# Altium PCB Cam_HDMI.PcbDoc
Units mm, origin at the board's own origin, x right, y up, seen from the top; angles counter-clockwise.
Board outline 24.3 x 24.3 mm, 2 copper layers (Top Layer, Bottom Layer); 16 components, 20 nets, 93 pads, 4 vias.
Unrouted connection lines stored in the file: 46.
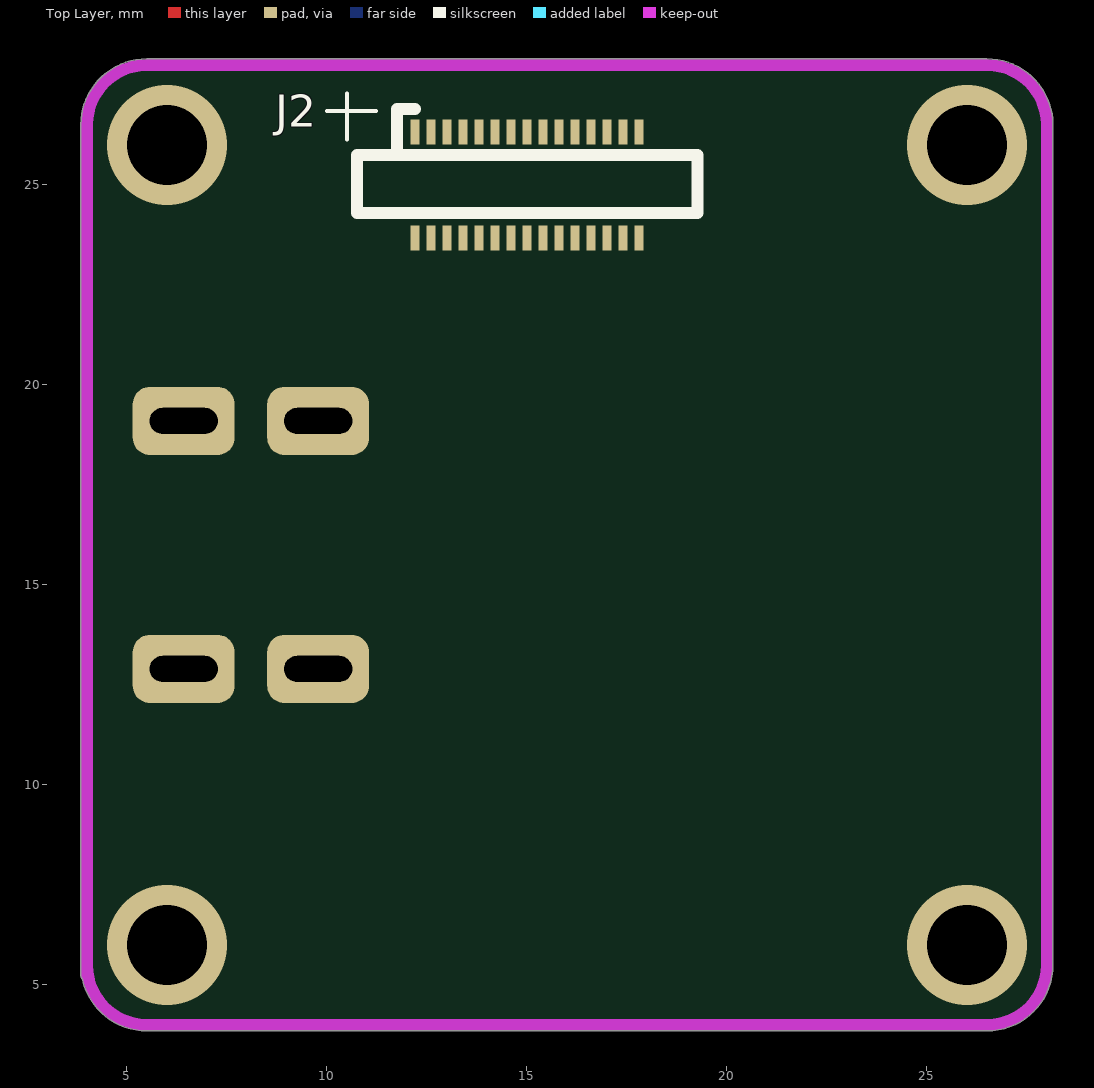
[diagram p0: Top Layer view]
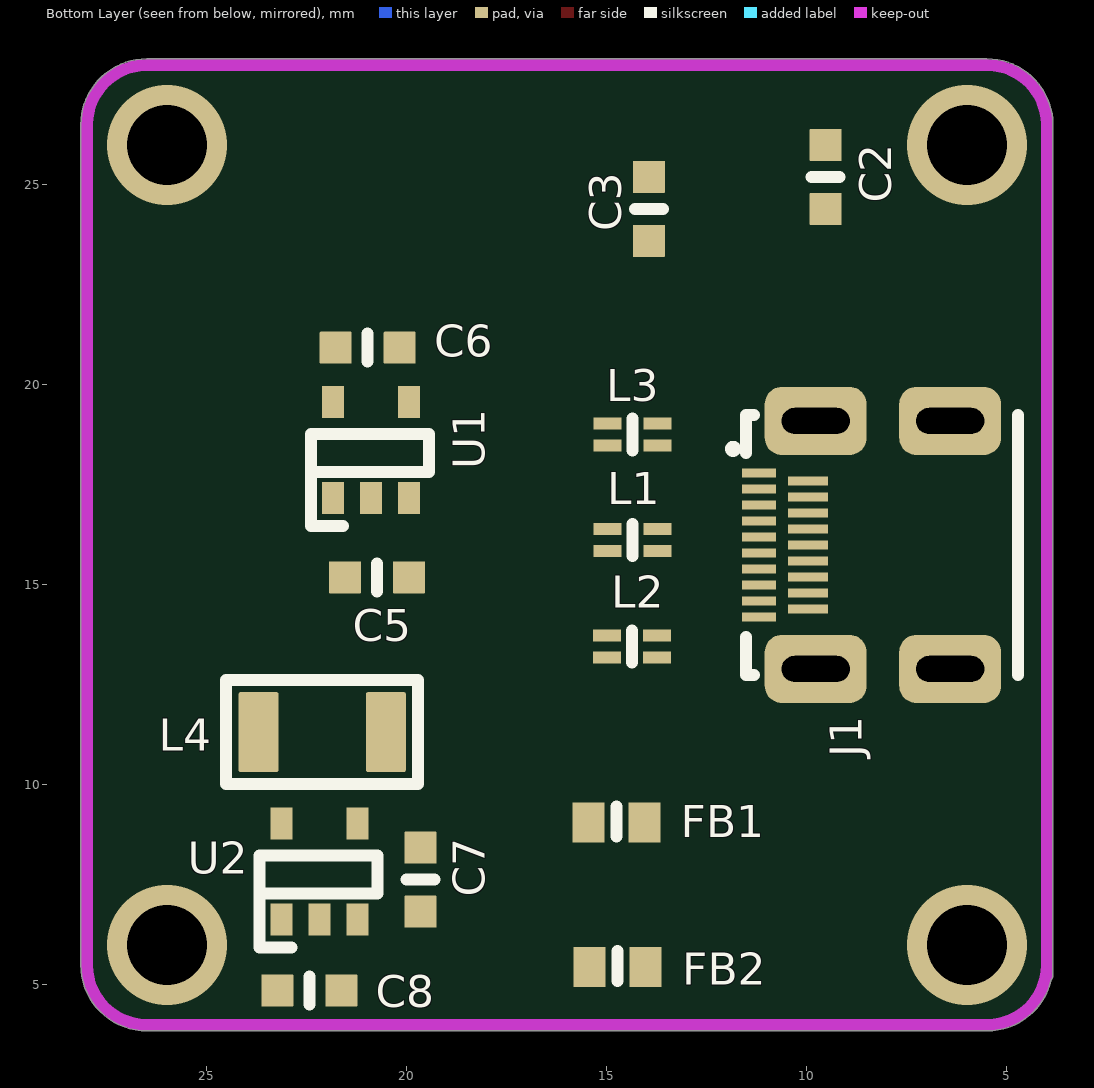
[diagram p1: Bottom Layer view, seen from below]

## Layer stack, top to bottom
Top Solder: solder mask 0.0102, Solder Resist, Dk 3.5
Top Layer: signal copper 0.0356
Dielectric 1: dielectric 0.32, FR-4, Dk 4.8
Bottom Layer: signal copper 0.0356
Bottom Solder: solder mask 0.0102, Solder Resist, Dk 3.5

## Board outline
3.89,5.138 ccw(c5.5,5.5) 5.499,3.85 ccw(c5.5,4) 5.5,3.85 26.5,3.85 ccw(c26.5,5.5) 28.15,5.5 28.15,26.5 ccw(c26.5,26.5) 26.5,28.15 5.501,28.15 ccw(c5.5,28) 5.5,28.15 ccw(c5.5,26.5) 3.85,26.5 3.85,5.24 ccw(c4,5.24)

## Design rules (kind name [scope] priority, off if disabled: settings)
Clearance [All] p1: gap=0.152 ignorepadtopadclearanceinfootprint=FALSE
DiffPairsRouting CAM0_DIFF [InDifferentialPairClass('DIFFPAIR_90')] p1: maxlimit=0.152 minlimit=0.152 mostfreqgap=0.152 toplayer_minwidth=0.152 toplayer_maxwidth=0.152 toplayer_prefwidth=0.152 bottomlayer_minwidth=0.152 bottomlayer_maxwidth=0.152 bottomlayer_prefwidth=0.152 maxuncoupledlength=12.7
PlaneConnect [All] p1: pad.planeconnectstyle=Relief pad.reliefexpansion=0.508 pad.reliefentries=4 pad.reliefconductorwidth=0.254 pad.reliefairgap=0.254 via.planeconnectstyle=Direct via.reliefexpansion=0.508 via.reliefentries=4 via.reliefconductorwidth=0.254 via.reliefairgap=0.254
PolygonConnect [All] p1: thpad.connectstyle=Relief thpad.reliefconductorwidth=0.254 thpad.reliefentries=4 thpad.polygonreliefangle="90 Angle" thpad.airgapwidth=0.254 smdpad.connectstyle=Relief smdpad.reliefconductorwidth=0.254 smdpad.reliefentries=4 smdpad.polygonreliefangle="90 Angle" smdpad.airgapwidth=0.254 via.connectstyle=Direct via.reliefconductorwidth=0.254 via.reliefentries=4 via.polygonreliefangle="90 Angle" via.airgapwidth=0.254
RoutingVias PWR_vias [InNetClass('Power')] p1: holewidth=0.6 width=1.1 viastyle="Through Hole" minholewidth=0.6 minwidth=1.1 maxholewidth=0.6 maxwidth=1.1
RoutingVias SIG_vias [All] p2: holewidth=0.4 width=0.7 viastyle="Through Hole" minholewidth=0.4 minwidth=0.7 maxholewidth=0.4 maxwidth=0.7
SolderMaskExpansion [All] p1: expansion=0.102 istentingtop=FALSE
Width PWR_width [InNetClass('Power')] p1: maxlimit=2 minlimit=0.152 preferedwidth=0.5
Width SIG_width [All] p2: maxlimit=0.5 minlimit=0.152 preferedwidth=0.3
28 further rules are at their usual default settings.

## Classes and differential pairs
net class Power: 1V2 2V8
differential pair class DIFFPAIR_90: CON_CSI_CLK CON_CSI_D0 CON_CSI_D1 CSI_CLK CSI_D0 CSI_D1 HDMI_CLK HDMI_D0 HDMI_D1
differential pair HDMI_D1: +HDMI_D1_P -HDMI_D1_N
differential pair HDMI_D0: +HDMI_D0_P -HDMI_D0_N
differential pair HDMI_CLK: +HDMI_CLK_P -HDMI_CLK_N
differential pair CSI_D1: +CSI_D1_P -CSI_D1_N
differential pair CSI_D0: +CSI_D0_P -CSI_D0_N
differential pair CSI_CLK: +CSI_CLK_P -CSI_CLK_N

## Components (designator, comment, footprint, x,y, rotation, side; value= is the part's Value field where it differs from the comment)
C2 "1uF/16V" CAP_CERA_C1608(CC0603INCH) 9.53,25.2 r270 bottom
C3 "1uF/16V" CAP_CERA_C1608(CC0603INCH) 13.95,24.4 r270 bottom
C5 "1uF/16V" CAP_CERA_C1608(CC0603INCH) 20.75,15.19 r180 bottom
C6 "1uF/16V" CAP_CERA_C1608(CC0603INCH) 20.98,20.93 r180 bottom
C7 "22uF/10V" CAP_CERA_C1608(CC0603INCH) 19.66,7.63 r270 bottom
C8 "10uF/10V" CAP_CERA_C1608(CC0603INCH) 22.44,4.86 r180 bottom
FB1 "BLM18AG601SN1" L0603 14.76,9.06 r0 bottom
FB2 "BLM18AG601SN1" L0603 14.73,5.45 r0 bottom
J1 "HDMI-0467651301" HDMI_MOLEX_0467650301 11.195,16 r90 bottom
J2 "DF37NC-30DS-0.4V" DF37NC-30DS-0.4V 15,25 r0 top
L1 "" DLP11SN900HL2L 14.365,16.12 r0 bottom
L2 "" DLP11SN900HL2L 14.37,13.46 r0 bottom
L3 "" DLP11SN900HL2L 14.365,18.755 r0 bottom
L4 "1uH MLP2520S1R0MT0S1" "L 2520mm" 22.718,14.22 r180 bottom
U1 "AP7331-28WG" SOT25 20.9,18.37 r0 bottom
U2 "" SOT25 22.18,7.84 r0 bottom

## Footprints (in the part's own frame and the unit in brackets; to place one, negate y for a bottom-side part, rotate by r counter-clockwise, add the part's x,y. Pads: shape width x height; smd on the part's side, far side on the other; paste and mask are expansions set on the pad)
CAP_CERA_C1608(CC0603INCH) [mm] "Chip Capacitor, 2-Leads, Body 2.0x1.3mm, IPC Medium Density"
  rrect5% 0.8x0.8 smd mask+0.1: 1(-0.8,0) 2(0.8,0)
  silkscreen extent 0,-0.35 0,0.35, body extent -0.8,-0.4 0.8,0.4, height 0.6
DF37NC-30DS-0.4V [mm]
  rect 0.23x0.63 smd mask+0.05: 1(-2.8,1.325) 2(-2.4,1.325) 3(-2,1.325) 4(-1.6,1.325) 5(-1.2,1.325) 6(-0.8,1.325) 7(-0.4,1.325) 8(0,1.325) 9(0.4,1.325) 10(0.8,1.325) 11(1.2,1.325) 12(1.6,1.325) 13(2,1.325) 14(2.4,1.325) 15(2.8,1.325) 16(2.8,-1.325) 17(2.4,-1.325) 18(2,-1.325) 19(1.6,-1.325) 20(1.2,-1.325) 21(0.8,-1.325) 22(0.4,-1.325) 23(0,-1.325) 24(-0.4,-1.325) 25(-0.8,-1.325) 26(-1.2,-1.325) 27(-1.6,-1.325) 28(-2,-1.325) 29(-2.4,-1.325) 30(-2.8,-1.325)
  silkscreen extent -4.25,-0.7 4.26,1.9, body extent -4.11,-1.49 4.11,1.49, height 0.87
DLP11SN900HL2L [mm]
  rect 0.7x0.3 smd mask+0.1: 1(-0.625,0.275) 2(0.625,0.275) 3(0.625,-0.275) 4(-0.625,-0.275)
  silkscreen extent 0,-0.4 0,0.4, body extent -0.63,-0.5 0.62,0.5, height 0.92
HDMI_MOLEX_0467650301 [mm]
  rrect10% 0.23x0.85 smd: 1(1.8,0) 3(1.4,0) 5(1,0) 7(0.6,0) 9(0.2,0) 11(-0.2,0) 13(-0.6,0) 15(-1,0) 17(-1.4,0) 19(-1.8,0)
  rrect10% 0.23x1 smd: 2(1.6,-1.225) 4(1.2,-1.225) 6(0.8,-1.225) 8(0.4,-1.225) 10(0,-1.225) 12(-0.4,-1.225) 14(-0.8,-1.225) 16(-1.2,-1.225) 18(-1.6,-1.225)
  rrect50% 1.7x2.55 hole 1.7 slot 0.65 at 0 deg: S1(-3.1,-1.415) S2(3.1,-1.415) S3(3.1,-4.775) S4(-3.1,-4.775)
  Top Layer pour cut-out: -1.9,-2.6 -1.9,-6.2 1.9,-6.2 1.9,-2.6
  silkscreen extent -3.25,-6.48 3.25,0.75, body extent -3.25,-7.18 3.25,0.32, height 2.92
L0603 [mm]
  rect 0.8x1 smd mask+0.1: 1(-0.7,0) 2(0.7,0)
  silkscreen extent 0,-0.4 0,0.35, body extent -0.86,-0.46 0.86,0.46, height 0.91
"L 2520mm" [mm]
  rrect10% 1x2 smd mask+0.1: 1(-0.992,-2.9) 2(2.192,-2.9)
  silkscreen extent -1.8,-4.2 3,-1.6, body extent -1,-3.7 2.2,-2.1, height 0.65
SOT25 [mm]
  rect 0.55x0.8 smd paste+0 mask+0.05: 1(0.95,1.2) 2(0,1.2) 3(-0.95,1.2) 4(-0.95,-1.2) 5(0.95,-1.2)
  silkscreen extent -1.45,-0.4 1.5,1.9, body extent -1.45,-1.4 1.45,1.4, height 1.2

## Part data
C2 C5 C6 C7 C8: library part "Cap Ceramic SMD", "0.1µF ±5% 16V Ceramic Capacitor X7R 0805 (2012 Metric)", BuyLink=https://www.digikey.com/product-detail/en/yageo/CC0805JRX7R7BB104/311-4266-1-ND/8025355
C3: library part "Cap Ceramic SMD", "1µF ±10% 16V Ceramic Capacitor X7R 0603 (1608 Metric)", BuyLink=https://www.digikey.com/product-detail/en/yageo/CC0805JRX7R7BB104/311-4266-1-ND/8025355
FB1 FB2: library part "Ferrite Bead", "600@100MHz", BuyLink=http://banlinhkien.com/cuon-cam-47uh-12x12x7mm-470-p6646214.html, LinkBuy=https://www.digikey.com/product-detail/en/bourns-inc/SRN5020-4R7M/SRN5020-4R7MCT-ND/3821535
J1: "HDMI - Micro Receptacle Connector 19 Position Surface Mount, Right Angle", Package=None, Availability=Unavailable, MF=Molex, MP=0467650301, Price=None, SnapEDA_Link=https://www.snapeda.com/parts/0467650301/Molex/view-part/2155824/?ref=snap
L1 L2 L3: library part DLP11SN900HL2L, LinkBuy=https://www.digikey.com/product-detail/en/wurth-electronics-inc/74438357015/732-11199-1-ND/6833658
L4: library part CIGT252008LM2R2MNE, "CIGT252008LM2R2MNE,  2.2µH2A, 2520", LinkBuy=https://www.digikey.com/product-detail/en/wurth-electronics-inc/74438357015/732-11199-1-ND/6833658
U1: "IC REG LINEAR 2.5V 150MA SOT25", LinkBuy=https://www.mouser.vn/ProductDetail/Diodes-Incorporated/AP7115-25WG-7?qs=%2Fha2pyFadugn4DWlmzZAouPhwfrO3PcDGacmxe98LPsTsMQB%2FiMcIQ%3D%3D
U2: library part SC189CSKTRT, "IC REG BUCK 1.2V 1.5A TSOT23-5", LinkBuy=https://www.mouser.vn/ProductDetail/Diodes-Incorporated/AP7115-25WG-7?qs=%2Fha2pyFadugn4DWlmzZAouPhwfrO3PcDGacmxe98LPsTsMQB%2FiMcIQ%3D%3D

## Via types
v1: diameter 3, hole 2, Top Layer to Bottom Layer, 4 vias

## Nets (pads, with @x,y where several pads share a name; then routed paths per layer and width w, separated by ;. In a path a pad name is that pad's centre, name@x,y a point inside that pad or via, vN(x,y) a via of type N, cw(c..) or ccw(c..) an arc to the next point about the centre after c; other vN are vias at no path point)
1V2: C2.1 C7.1 J2.4 L4.2 U2.4
2V8: C3.1 C6.1 J2.10 U1.5
3V3: FB1.1 FB2.1 J1.19
CSI_CLK_N: J2.26 L3.2
CSI_CLK_P: J2.27 L3.3
CSI_D0_N: J2.23 L1.2
CSI_D0_P: J2.24 L1.3
CSI_D1_N: J2.20 L2.2
CSI_D1_P: J2.21 L2.3
ENABLE: J1.12 U1.3 U2.3
GND: C2.2 C3.2 C5.2 C6.2 C7.2 C8.2 J1.1 J2.6 J2.8 J2.9 J2.12 J2.15 J2.16 J2.19 J2.22 J2.25 J2.28 U1.2 U2.2
HDMI_CLK_N: J1.5 L3.1
HDMI_CLK_P: J1.3 L3.4
HDMI_D0_N: J1.8 L1.1
HDMI_D0_P: J1.6 L1.4
HDMI_D1_N: J1.11 L2.1
HDMI_D1_P: J1.9 L2.4
NetC5_1: C5.1 FB1.2 U1.1
NetC8_1: C8.1 FB2.2 U2.1
NetL4_1: L4.1 U2.5
pads on no net: J1.2 J1.4 J1.7 J1.10 J1.13 J1.14 J1.15 J1.16 J1.17 J1.18 J1.S1 J1.S2 J1.S3 J1.S4 J2.1 J2.2 J2.3 J2.5 J2.7 J2.11 J2.13 J2.14 J2.17 J2.18 J2.29 J2.30 U1.4
copper on no net:
  other v1: 6,6 26,6 6,26 26,26

## Keep-outs
Keep-Out Layer:
  lines w0.3: 4,5.24 4,26.5 cw(c5.5,26.5) 5.5,28 26.5,28 cw(c26.5,26.5) 28,26.5 28,5.5 cw(c26.5,5.5) 26.5,4 5.5,4 cw(c5.5,5.5) 4,5.5

## Silkscreen, mask and mechanical layers (free items; w line width, h text height)
Top Overlay:
  lines w0.1: 10,26.85 11.23,26.85 ; 10.5,26.14 10.5,27.28

## Text inside footprints (layer, text, board x,y; h text height)
J2: Mechanical 1 "1" at 11.55,26.35 h0.8